# EAGLE board DarkScope (EAGLE 9.0.0)

Size 160 x 100 mm. Coordinates in mm from the lower left corner, seen from the top.
Outline: 0,0 160,0 160,100 0,100 0,0
Copper layers (1*16): Top 0.035mm / dielectric 1.5mm / Bottom 0.035mm
Design rules "default": minimum track width 6mil, minimum drill 0.35mm, track to track 6mil, track to pad 6mil, pad to pad 6mil, via to via 6mil, smd to smd 6mil, copper to edge 40mil, drill to drill 6mil, minimum pad ring 10mil, minimum via ring 8mil, stop-mask expansion 4mil, vias tented up to drill 0mil, thermal gap 10mil

## Footprints (pad centres in the part's own frame; a part is rotated, then mirrored left to right if it is on the bottom)
C0603 = smd 1.1 x 1: 1 -0.85,0; 2 0.85,0
CTRIM3018_11 = smd 2.3 x 1.6: + -2.35,0; - 2.35,0
C0603K = smd 1.05 x 1.08: 1 -0.875,0; 2 0.875,0
C1206 = smd 1.6 x 1.8: 1 -1.4,0; 2 1.4,0
SOD80C = smd 1.4 x 1.8: A 1.7,0; C -1.7,0
SMC = smd 2.8 x 3.8: A 3.7,0; C -3.7,0
DIODE_SMC = smd 2.8 x 3.8: A 3.7,0; C -3.7,0
QFP50P2200X2200X160-144N = smd 1.475 x 0.3: 1 -10.738,8.75; 2 -10.738,8.25; 3 -10.738,7.75; 4 -10.738,7.25; 5 -10.738,6.75; 6 -10.738,6.25; 7 -10.738,5.75; 8 -10.738,5.25; 9 -10.738,4.75; 10 -10.738,4.25; 11 -10.738,3.75; 12 -10.738,3.25; 13 -10.738,2.75; 14 -10.738,2.25; 15 -10.738,1.75; 16 -10.738,1.25; 17 -10.738,0.75; 18 -10.738,0.25; 19 -10.738,-0.25; 20 -10.738,-0.75; 21 -10.738,-1.25; 22 -10.738,-1.75; 23 -10.738,-2.25; 24 -10.738,-2.75; 25 -10.738,-3.25; 26 -10.738,-3.75; 27 -10.738,-4.25; 28 -10.738,-4.75; 29 -10.738,-5.25; 30 -10.738,-5.75; 31 -10.738,-6.25; 32 -10.738,-6.75; 33 -10.738,-7.25; 34 -10.738,-7.75; 35 -10.738,-8.25; 36 -10.738,-8.75; 73 10.738,-8.75; 74 10.738,-8.25; 75 10.738,-7.75; 76 10.738,-7.25; 77 10.738,-6.75; 78 10.738,-6.25; 79 10.738,-5.75; 80 10.738,-5.25; 81 10.738,-4.75; 82 10.738,-4.25; 83 10.738,-3.75; 84 10.738,-3.25; 85 10.738,-2.75; 86 10.738,-2.25; 87 10.738,-1.75; 88 10.738,-1.25; 89 10.738,-0.75; 90 10.738,-0.25; 91 10.738,0.25; 92 10.738,0.75; 93 10.738,1.25; 94 10.738,1.75; 95 10.738,2.25; 96 10.738,2.75; 97 10.738,3.25; 98 10.738,3.75; 99 10.738,4.25; 100 10.738,4.75; 101 10.738,5.25; 102 10.738,5.75; 103 10.738,6.25; 104 10.738,6.75; 105 10.738,7.25; 106 10.738,7.75; 107 10.738,8.25; 108 10.738,8.75 | smd 0.3 x 1.475: 37 -8.75,-10.738; 38 -8.25,-10.738; 39 -7.75,-10.738; 40 -7.25,-10.738; 41 -6.75,-10.738; 42 -6.25,-10.738; 43 -5.75,-10.738; 44 -5.25,-10.738; 45 -4.75,-10.738; 46 -4.25,-10.738; 47 -3.75,-10.738; 48 -3.25,-10.738; 49 -2.75,-10.738; 50 -2.25,-10.738; 51 -1.75,-10.738; 52 -1.25,-10.738; 53 -0.75,-10.738; 54 -0.25,-10.738; 55 0.25,-10.738; 56 0.75,-10.738; 57 1.25,-10.738; 58 1.75,-10.738; 59 2.25,-10.738; 60 2.75,-10.738; 61 3.25,-10.738; 62 3.75,-10.738; 63 4.25,-10.738; 64 4.75,-10.738; 65 5.25,-10.738; 66 5.75,-10.738; 67 6.25,-10.738; 68 6.75,-10.738; 69 7.25,-10.738; 70 7.75,-10.738; 71 8.25,-10.738; 72 8.75,-10.738; 109 8.75,10.738; 110 8.25,10.738; 111 7.75,10.738; 112 7.25,10.738; 113 6.75,10.738; 114 6.25,10.738; 115 5.75,10.738; 116 5.25,10.738; 117 4.75,10.738; 118 4.25,10.738; 119 3.75,10.738; 120 3.25,10.738; 121 2.75,10.738; 122 2.25,10.738; 123 1.75,10.738; 124 1.25,10.738; 125 0.75,10.738; 126 0.25,10.738; 127 -0.25,10.738; 128 -0.75,10.738; 129 -1.25,10.738; 130 -1.75,10.738; 131 -2.25,10.738; 132 -2.75,10.738; 133 -3.25,10.738; 134 -3.75,10.738; 135 -4.25,10.738; 136 -4.75,10.738; 137 -5.25,10.738; 138 -5.75,10.738; 139 -6.25,10.738; 140 -6.75,10.738; 141 -7.25,10.738; 142 -7.75,10.738; 143 -8.25,10.738; 144 -8.75,10.738
SOIC127P600X175-8N = smd 1.525 x 0.65: 1 -2.712,1.905; 2 -2.712,0.635; 3 -2.712,-0.635; 4 -2.712,-1.905; 5 2.712,-1.905; 6 2.712,-0.635; 7 2.712,0.635; 8 2.712,1.905
SOT95P280X145-5N = smd 1.2 x 0.6: 1 -1.25,0.95; 2 -1.25,0; 3 -1.25,-0.95; 4 1.25,-0.95; 5 1.25,0.95
QFN50P400X400X100-21N = smd 0.8 x 0.3: 1 -2,1; 2 -2,0.5; 3 -2,0; 4 -2,-0.5; 5 -2,-1; 11 2,-1; 12 2,-0.5; 13 2,0; 14 2,0.5; 15 2,1 | smd 0.3 x 0.8: 6 -1,-2; 7 -0.5,-2; 8 0,-2; 9 0.5,-2; 10 1,-2; 16 1,2; 17 0.5,2; 18 0,2; 19 -0.5,2; 20 -1,2 | smd 2.8 x 2.8: 21 0,0
SOT223 = smd 1.499 x 2.007: 1 -2.261,-3.15; 2 0.025,-3.15; 3 2.311,-3.15 | smd 3.81 x 2.007: 4 0,3.15
C0R-JMP = smd 0.8 x 1: 1 0,0.938; 3 0,-0.938 | smd 1 x 0.8: 2 0,0
0204/7 = drill 0.813 octagon: 1 -3.81,0; 2 3.81,0
R0603 = smd 1 x 1.1: 1 -0.85,0; 2 0.85,0
MICRO-SD9+4P-SMD-16.1X14.5X1.85MM = smd 1.6 x 0.7: 1 0,2.25; 2 0,1.15; 3 0,0.05; 4 0,-1.05; 5 0,-2.15; 6 0,-3.25; 7 0,-4.35; 8 0,-5.45; 9 0,-6.55 | smd 1.6 x 1.4: G1 0.6,-7.85 | smd 2.2 x 1.4: G2 10.1,-7.85; G3 10.1,7.85 | smd 1.4 x 1.8: G4 0.5,6.95 | hole 0.9: 10.5,-4.95; 10.5,3.05
SJ = smd 1.168 x 1.6: 1 -0.762,0; 2 0.762,0
SOT23-BEC = smd 1 x 1.4: B -0.95,-1.1; C 0,1.1; E 0.95,-1.1
TP07R = smd 0.7 x 0.7: TP 0,0
QFN50P700X700X80-48 = smd 0.55 x 0.25: 1 -3.378,2.75; 2 -3.378,2.25; 3 -3.378,1.75; 4 -3.378,1.25; 5 -3.378,0.75; 6 -3.378,0.25; 7 -3.378,-0.25; 8 -3.378,-0.75; 9 -3.378,-1.25; 10 -3.378,-1.75; 11 -3.378,-2.25; 12 -3.378,-2.75; 25 3.378,-2.75; 26 3.378,-2.25; 27 3.378,-1.75; 28 3.378,-1.25; 29 3.378,-0.75; 30 3.378,-0.25; 31 3.378,0.25; 32 3.378,0.75; 33 3.378,1.25; 34 3.378,1.75; 35 3.378,2.25; 36 3.378,2.75 | smd 0.25 x 0.55: 13 -2.75,-3.378; 14 -2.25,-3.378; 15 -1.75,-3.378; 16 -1.25,-3.378; 17 -0.75,-3.378; 18 -0.25,-3.378; 19 0.25,-3.378; 20 0.75,-3.378; 21 1.25,-3.378; 22 1.75,-3.378; 23 2.25,-3.378; 24 2.75,-3.378; 37 2.75,3.378; 38 2.25,3.378; 39 1.75,3.378; 40 1.25,3.378; 41 0.75,3.378; 42 0.25,3.378; 43 -0.25,3.378; 44 -0.75,3.378; 45 -1.25,3.378; 46 -1.75,3.378; 47 -2.25,3.378; 48 -2.75,3.378
BGA48C75P6X8_950X800X100 = smd 0.25 x 0.25: A1 -1.875,2.625; A2 -1.125,2.625; A3 -0.375,2.625; A4 0.375,2.625; A5 1.125,2.625; A6 1.875,2.625; B1 -1.875,1.875; B2 -1.125,1.875; B3 -0.375,1.875; B4 0.375,1.875; B5 1.125,1.875; B6 1.875,1.875; C1 -1.875,1.125; C2 -1.125,1.125; C3 -0.375,1.125; C4 0.375,1.125; C5 1.125,1.125; C6 1.875,1.125; D1 -1.875,0.375; D2 -1.125,0.375; D3 -0.375,0.375; D4 0.375,0.375; D5 1.125,0.375; D6 1.875,0.375; E1 -1.875,-0.375; E2 -1.125,-0.375; E3 -0.375,-0.375; E4 0.375,-0.375; E5 1.125,-0.375; E6 1.875,-0.375; F1 -1.875,-1.125; F2 -1.125,-1.125; F3 -0.375,-1.125; F4 0.375,-1.125; F5 1.125,-1.125; F6 1.875,-1.125; G1 -1.875,-1.875; G2 -1.125,-1.875; G3 -0.375,-1.875; G4 0.375,-1.875; G5 1.125,-1.875; G6 1.875,-1.875; H1 -1.875,-2.625; H2 -1.125,-2.625; H3 -0.375,-2.625; H4 0.375,-2.625; H5 1.125,-2.625; H6 1.875,-2.625
MICRO-USB5+6P-SMD-0.65-AB = smd 0.4 x 1.35: 1 -1.3,2.875; 2 -0.65,2.875; 3 0,2.875; 4 0.65,2.875; 5 1.3,2.875 | smd 1.9 x 1.9: P1 -1.2,0; P2 1.2,0 | drill 0.508 pad 1.016 long: P3 -3.625,0; P4 3.625,0 | drill 0.8: P5 -2.425,2.73; P6 2.425,2.73
SMD2,54-5,08 = smd 2.54 x 5.08: 1 0,0
AMP_227161 = drill 0.9 pad 1.27: 1 0,-5.08; 2 -2.54,-5.08 | hole 2: -5.08,0; 5.08,0

## Placement (x,y rotation side)
C1  0.1uf  [C0603]  -105.41,104.14 0 top  (outside the outline)
C2  220pf  [C0603]  -73.66,104.14 0 top  (outside the outline)
C3  3pf  [C0603]  -87.63,116.84 0 top  (outside the outline)
C4  1PF  [C0603]  -64.77,111.76 0 top  (outside the outline)
C5  30pf  [CTRIM3018_11]  -64.77,72.39 0 top  (outside the outline)
C6  30pf  [CTRIM3018_11]  -72.39,72.39 0 top  (outside the outline)
C7  120pf  [C0603]  -80.01,104.14 0 top  (outside the outline)
C8  120pf  [C0603]  -86.36,104.14 0 top  (outside the outline)
C9  0.1uf  [C0603]  -17.78,111.76 0 top  (outside the outline)
C10  100uf  [C0603K]  -97.79,116.84 0 top  (outside the outline)
C11  1uf  [C0603K]  -19.05,121.92 0 top  (outside the outline)
C12  100uf  [C0603K]  -102.87,116.84 0 top  (outside the outline)
C13  1uf  [C0603K]  -15.24,121.92 0 top  (outside the outline)
C14  [C0603K]  -105.41,129.54 0 top  (outside the outline)
C15  [C0603K]  -15.24,133.35 0 top  (outside the outline)
C37  100uF Tantalum  [C1206]  -44.45,97.79 0 top  (outside the outline)
D1  [SOD80C]  -27.94,120.65 0 top  (outside the outline)
D2  ss14  [SMC]  -91.44,59.69 0 top  (outside the outline)
D3  ss14  [SMC]  -19.05,73.66 0 top  (outside the outline)
D4  [SOD80C]  -33.02,120.65 0 top  (outside the outline)
D5  [DIODE_SMC]  -81.28,71.12 0 top  (outside the outline)
D6  [DIODE_SMC]  -92.71,71.12 0 top  (outside the outline)
D7  3V3_Z_D  [SOD80C]  -54.61,97.79 0 top  (outside the outline)
IC1  ATSAME70Q21A-AN  [QFP50P2200X2200X160-144N]  -43.18,12.7 0 top  (outside the outline)
IC3  TLE2082ID  [SOIC127P600X175-8N]  -17.78,105.41 0 top  (outside the outline)
IC4  SP6641BEK-L-5-0  [SOT95P280X145-5N]  -64.77,121.92 0 top  (outside the outline)
IC5  SP6641BEK-L-5-0  [SOT95P280X145-5N]  -81.28,121.92 0 top  (outside the outline)
IC6  AT45DB161E-SSHD-T  [SOIC127P600X175-8N]  -67.31,97.79 0 top  (outside the outline)
IC7  AT45DB161E-SSHD-T  [SOIC127P600X175-8N]  -87.63,97.79 0 top  (outside the outline)
IC8  MCP73871-2CAI_ML  [QFN50P400X400X100-21N]  -43.18,105.41 0 top  (outside the outline)
IC9  TLE2082ID  [SOIC127P600X175-8N]  -27.94,105.41 0 top  (outside the outline)
IC10  REG1117  [SOT223]  -77.47,60.96 0 top  (outside the outline)
IC_VDD_SELECT  0R-JUMPC  [C0R-JMP]  -49.53,72.39 0 top  (outside the outline)
JMP1  0R-JUMPC  [C0R-JMP]  -59.69,72.39 0 top  (outside the outline)
L1  10uH  [0204/7]  -40.64,120.65 0 top  (outside the outline)
L2  10uH  [0204/7]  -50.8,120.65 0 top  (outside the outline)
NTC  10K  [R0603]  -54.61,111.76 0 top  (outside the outline)
PROG1  2K2  [R0603]  -58.42,104.14 0 top  (outside the outline)
PROG2  10k  [R0603]  -67.31,104.14 0 top  (outside the outline)
R1  22K  [R0603]  -57.15,116.84 0 top  (outside the outline)
R2  10K  [R0603]  -62.23,116.84 0 top  (outside the outline)
R3  100k  [R0603]  -30.48,111.76 0 top  (outside the outline)
R4  1.8M  [R0603]  -24.13,111.76 0 top  (outside the outline)
R5  2M  [R0603]  -92.71,116.84 0 top  (outside the outline)
R6  200k  [R0603]  -36.83,111.76 0 top  (outside the outline)
R7  20k  [R0603]  -82.55,116.84 0 top  (outside the outline)
R8  300  [R0603]  -72.39,116.84 0 top  (outside the outline)
R9  180  [R0603]  -77.47,116.84 0 top  (outside the outline)
R10  120  [R0603]  -69.85,111.76 0 top  (outside the outline)
R11  1k  [R0603]  -67.31,116.84 0 top  (outside the outline)
R12  3k  [R0603]  -74.93,111.76 0 top  (outside the outline)
R13  2.2K  [R0603]  -59.69,111.76 0 top  (outside the outline)
R14  330E  [R0603]  -92.71,104.14 0 top  (outside the outline)
R15  120  [R0603]  -80.01,111.76 0 top  (outside the outline)
R16  100k  [R0603]  -43.18,111.76 0 top  (outside the outline)
R17  100k  [R0603]  -49.53,111.76 0 top  (outside the outline)
R18  1k  [R0603]  -85.09,111.76 0 top  (outside the outline)
R19  10E  [R0603]  -90.17,111.76 0 top  (outside the outline)
R20  10E  [R0603]  -95.25,111.76 0 top  (outside the outline)
R21  680E  [R0603]  -99.06,104.14 0 top  (outside the outline)
R22  10K  [R0603]  -100.33,111.76 0 top  (outside the outline)
R23  68K  [R0603]  -105.41,111.76 0 top  (outside the outline)
R24  1k  [R0603]  -16.51,116.84 0 top  (outside the outline)
R25  1k  [R0603]  -21.59,116.84 0 top  (outside the outline)
R26  1k  [R0603]  -26.67,116.84 0 top  (outside the outline)
R27  1k  [R0603]  -31.75,116.84 0 top  (outside the outline)
R74  10k  [R0603]  -36.83,116.84 0 top  (outside the outline)
R75  10k  [R0603]  -41.91,116.84 0 top  (outside the outline)
R76  10k  [R0603]  -46.99,116.84 0 top  (outside the outline)
R77  10k  [R0603]  -52.07,116.84 0 top  (outside the outline)
SD1  ST-TF-003A  [MICRO-SD9+4P-SMD-16.1X14.5X1.85MM]  -71.12,8.89 0 top  (outside the outline)
SJ1  [SJ]  -22.86,120.65 0 top  (outside the outline)
T1  BC807-40SMD  [SOT23-BEC]  -24.13,82.55 0 top  (outside the outline)
T2  BC807-40SMD  [SOT23-BEC]  -38.1,82.55 0 top  (outside the outline)
T3  BC807-40SMD  [SOT23-BEC]  -52.07,82.55 0 top  (outside the outline)
T4  BC807-40SMD  [SOT23-BEC]  -66.04,82.55 0 top  (outside the outline)
T5  BC807-40SMD  [SOT23-BEC]  -80.01,82.55 0 top  (outside the outline)
T6  BC807-40SMD  [SOT23-BEC]  -93.98,82.55 0 top  (outside the outline)
T7  BC807-40SMD  [SOT23-BEC]  -24.13,90.17 0 top  (outside the outline)
T8  BC807-40SMD  [SOT23-BEC]  -38.1,90.17 0 top  (outside the outline)
T9  BC807-40SMD  [SOT23-BEC]  -52.07,90.17 0 top  (outside the outline)
T10  BC807-40SMD  [SOT23-BEC]  -66.04,90.17 0 top  (outside the outline)
T11  BC807-40SMD  [SOT23-BEC]  -80.01,90.17 0 top  (outside the outline)
T12  BC807-40SMD  [SOT23-BEC]  -93.98,90.17 0 top  (outside the outline)
T41  BC807-40SMD  [SOT23-BEC]  -24.13,97.79 0 top  (outside the outline)
TP1  TPTP07R  [TP07R]  -60.96,129.54 0 top  (outside the outline)
TP2  TPTP07R  [TP07R]  -66.04,129.54 0 top  (outside the outline)
TP3  TPTP07R  [TP07R]  -71.12,129.54 0 top  (outside the outline)
TP4  TPTP07R  [TP07R]  -76.2,129.54 0 top  (outside the outline)
TP5  TPTP07R  [TP07R]  -81.28,129.54 0 top  (outside the outline)
TP6  TPTP07R  [TP07R]  -86.36,129.54 0 top  (outside the outline)
TP7  TPTP07R  [TP07R]  -91.44,129.54 0 top  (outside the outline)
TP8  TPTP07R  [TP07R]  -96.52,129.54 0 top  (outside the outline)
TP9  TPTP07R  [TP07R]  -101.6,129.54 0 top  (outside the outline)
TP10  TPTP07R  [TP07R]  -93.98,120.65 0 top  (outside the outline)
TP11  TPTP07R  [TP07R]  -55.88,129.54 0 top  (outside the outline)
TP12  TPTP07R  [TP07R]  -100.33,120.65 0 top  (outside the outline)
TP13  TPTP07R  [TP07R]  -17.78,125.73 0 top  (outside the outline)
TP14  TPTP07R  [TP07R]  -24.13,125.73 0 top  (outside the outline)
TP15  TPTP07R  [TP07R]  -30.48,125.73 0 top  (outside the outline)
TP16  TPTP07R  [TP07R]  -36.83,125.73 0 top  (outside the outline)
TP17  TPTP07R  [TP07R]  -43.18,125.73 0 top  (outside the outline)
TP18  TPTP07R  [TP07R]  -49.53,125.73 0 top  (outside the outline)
TP19  TPTP07R  [TP07R]  -55.88,125.73 0 top  (outside the outline)
TP20  TPTP07R  [TP07R]  -62.23,125.73 0 top  (outside the outline)
TP21  TPTP07R  [TP07R]  -68.58,125.73 0 top  (outside the outline)
TP22  TPTP07R  [TP07R]  -74.93,125.73 0 top  (outside the outline)
TP23  TPTP07R  [TP07R]  -81.28,125.73 0 top  (outside the outline)
TP24  TPTP07R  [TP07R]  -87.63,125.73 0 top  (outside the outline)
TP25  TPTP07R  [TP07R]  -93.98,125.73 0 top  (outside the outline)
TP26  TPTP07R  [TP07R]  -100.33,125.73 0 top  (outside the outline)
TP27  TPTP07R  [TP07R]  -17.78,129.54 0 top  (outside the outline)
TP28  TPTP07R  [TP07R]  -24.13,129.54 0 top  (outside the outline)
TP29  TPTP07R  [TP07R]  -30.48,129.54 0 top  (outside the outline)
TP30  TPTP07R  [TP07R]  -36.83,129.54 0 top  (outside the outline)
TP31  TPTP07R  [TP07R]  -43.18,129.54 0 top  (outside the outline)
TP32  TPTP07R  [TP07R]  -49.53,129.54 0 top  (outside the outline)
U$20  MAX19516ETM+MAX19516ETM+  [QFN50P700X700X80-48]  -27.94,60.96 0 top  (outside the outline)
U$21  MAX19516ETM+MAX19516ETM+  [QFN50P700X700X80-48]  -57.15,60.96 0 top  (outside the outline)
U$22  CY62167DV30LLCY62167DV30LL-55BVI  [BGA48C75P6X8_950X800X100]  -30.48,46.99 0 top  (outside the outline)
U$23  CY62167DV30LLCY62167DV30LL-55BVI  [BGA48C75P6X8_950X800X100]  -66.04,46.99 0 top  (outside the outline)
USB1  ZX62-B-5PA  [MICRO-USB5+6P-SMD-0.65-AB]  -29.21,72.39 0 top  (outside the outline)
VBAT+  [SMD2,54-5,08]  -27.94,97.79 0 top  (outside the outline)
VBAT-/GND  [SMD2,54-5,08]  -82.55,58.42 0 top  (outside the outline)
X1  1-227161-0  [AMP_227161]  -22.86,10.16 0 top  (outside the outline)

## Library data of the parts
C1-C9 C14 C15 C37 = rcl; SPICEPREFIX: C
C10-C13 = resistor
D1-D4 D7 = diode
D5 D6 = eagle-ltspice; SPICEMODEL: NONE; SPICEPREFIX: D; SPICETYPE: diode
IC1 = SamacSys_Parts; ARROW_PART_NUMBER: ATSAME70Q21A-AN; ARROW_PRICE/STOCK: https://www.arrow.com/en/products/atsame70q21a-an/microchip-technology; DESCRIPTION: ATMEL - ATSAME70Q21A-AN - MCU, 32BIT, CORTEX-M7, 300MHZ, LQFP-144; HEIGHT: 1.6mm; MANUFACTURER_NAME: Microchip; MANUFACTURER_PART_NUMBER: ATSAME70Q21A-AN; RS_PART_NUMBER: 1463226; RS_PRICE/STOCK: http://uk.rs-online.com/web/p/products/1463226
IC3 IC9 = SamacSys_Parts; ARROW_PART_NUMBER: TLE2082ID; ARROW_PRICE/STOCK: https://www.arrow.com/en/products/tle2082id/texas-instruments; DESCRIPTION: TLE2082ID, Dual Operational Amplifier 9.4MHz, 8-Pin SOIC; HEIGHT: 1.75mm; MANUFACTURER_NAME: Texas Instruments; MANUFACTURER_PART_NUMBER: TLE2082ID; RS_PART_NUMBER: 3570120P; RS_PRICE/STOCK: http://uk.rs-online.com/web/p/products/3570120P
IC4 IC5 = SamacSys_Parts; ARROW_PART_NUMBER: SP6641BEK-L-3-3/TR; ARROW_PRICE/STOCK: https://www.arrow.com/en/products/sp6641bek-l-3-3tr/exar; DESCRIPTION: Voltage Regulators - Switching Regulators 100mA Alkaline DC/DC; HEIGHT: 1.45mm; MANUFACTURER_NAME: EXAR; MANUFACTURER_PART_NUMBER: SP6641BEK-L-3-3/TR
IC6 IC7 = SamacSys_Parts; ARROW_PART_NUMBER: AT45DB161E-SSHD-T; ARROW_PRICE/STOCK: https://www.arrow.com/en/products/at45db161e-sshd-t/adesto-technologies-corporation-inc; DESCRIPTION: Flash Memory 16M 2.5-3.6V 85Mhz Data Flash; HEIGHT: 1.75mm; MANUFACTURER_NAME: Adesto Technologies; MANUFACTURER_PART_NUMBER: AT45DB161E-SSHD-T
IC8 = SamacSys_Parts; ALLIED_NUMBER: 70046852; ALLIED_PRICE/STOCK: http://www.alliedelec.com/microchip-technology-inc-mcp73871-2cai-ml/70046852/; ARROW_PART_NUMBER: MCP73871-2CAI/ML; ARROW_PRICE/STOCK: https://www.arrow.com/en/products/mcp73871-2caiml/microchip-technology; DESCRIPTION: Li-Ion Charger USB/DC 4.2V 1A TE QFN20; HEIGHT: 1mm; MANUFACTURER_NAME: Microchip; MANUFACTURER_PART_NUMBER: MCP73871-2CAI/ML; RS_PART_NUMBER: 1460132; RS_PRICE/STOCK: http://uk.rs-online.com/web/p/products/1460132
IC10 = burr-brown; MPN: REG1117; OC_FARNELL: 1097566; OC_NEWARK: 14P6981
IC_VDD_SELECT JMP1 = jump-0r-smd
L1 L2 = eagle-ltspice; SPICEMODEL: NONE; SPICEPREFIX: L
NTC PROG1 PROG2 R1-R27 R74-R77 = rcl; SPICEPREFIX: R
SD1 = Seeed-Connector; MPN: ST-TF-003A
SJ1 = jumper
T1-T12 T41 = transistor-pnp
TP1-TP32 = testpad
U$20-U$23 = Boltz_RnD
USB1 = Seeed-Connector; MPN: ZX62-B-5PA
VBAT+ VBAT-/GND = wirepad
X1 = con-coax; MF: TYCO ELECTRONICS; MPN: 1-227161; OC_FARNELL: unknown; OC_NEWARK: 33B3200

## Nets
3V3: T41.E TP31.TP
3V3D: C15.1 IC10.2 T41.C TP29.TP TP32.TP
+3V3: C10.1 IC4.5 IC_VDD_SELECT.1 L1.2
+5V: C37.1 D5.C D6.C IC8.2 IC8.18 IC8.19 PROG2.2 R77.2 TP17.TP TP25.TP
+5V/1: C11.1 D2.C IC3.8 IC9.8 IC_VDD_SELECT.3 R12.2 R20.1 TP7.TP TP11.TP TP28.TP
+5V/2: C13.1 D3.C R19.1 TP27.TP
BMC_PG: R76.1 TP19.TP
BMC_STAT1: R74.1 TP21.TP
BMC_STAT2: R75.1 TP20.TP
CNTRL_3_3V: T41.B
GND: C5.- C6.- C7.2 C8.2 C9.2 C10.2 C11.2 C12.2 C13.2 C14.2 C15.2 C37.2 D7.A IC3.4 IC4.2 IC5.2 IC8.10 IC8.11 IC9.4 IC10.1 PROG1.1 R6.2 R7.2 R10.2 R21.1 SJ1.1 T4.C TP15.TP TP26.TP USB1.5 USB1.P1 USB1.P2 USB1.P3 USB1.P4 USB1.P5 USB1.P6 VBAT-/GND.1
GND1: IC1.44
GND2: IC1.61
GND3: IC1.95
GND4: IC1.115
GND5: IC1.135
GND6: IC1.138
N$1: R2.1 X1.2
N$2: JMP1.1 R1.1 R2.2 TP12.TP
N$3: C1.2 T3.C
N$4: T1.B
N$5: R8.2 R9.1 T8.C
N$6: D4.C R22.1 R23.2 T12.C TP1.TP TP13.TP X1.1
N$7: T10.B
N$8: C2.1 C3.1 C4.1 R3.2 R4.2 R5.2 T2.E T3.E T4.E TP2.TP
N$9: C4.2 C6.+ C7.1 R5.1 R7.1 T7.C
N$10: C2.2 R3.1 T5.C
N$11: C3.2 C5.+ R4.1 R6.1 T6.C
N$12: R9.2 R10.1 T9.C
N$13: IC3.3 T5.E T6.E T7.E TP3.TP
N$14: D2.A IC4.1 L1.1
N$15: T5.B
N$16: T6.B
N$17: T7.B
N$18: T4.B
N$19: T3.B
N$20: T2.B
N$21: IC3.5 T8.E T9.E T10.E TP4.TP
N$22: IC3.6 R11.1 R12.1 R13.2
N$23: IC3.7 R11.2 R14.1 R15.2
N$24: C8.1 R14.2 TP8.TP
N$25: IC9.3 R15.1 R16.2
N$26: IC9.1 R16.1 R18.2 TP6.TP
N$27: C9.1 IC9.2 R17.2
N$28: R17.1 TP10.TP
N$29: R18.1 TP9.TP
N$30: D7.C IC3.1 IC3.2 R8.1 T10.C TP5.TP
N$31: IC4.3 R20.2
N$32: IC5.3 R19.2
N$33: D3.A IC5.1 L2.1
N$34: R13.1 R21.2 SJ1.2
N$35: T8.B
N$36: R22.2 T1.E
N$37: R1.2 R23.1
N$38: JMP1.2 T1.C
N$39: T9.B
N$40: D1.A R24.2 R25.2
N$41: R25.1 T11.B
N$42: D1.C T11.C
N$43: D4.A R26.2 R27.2
N$44: R27.1 T12.B
N$46: C1.1 T2.C T12.E
N$117: IC8.8 R74.2
N$118: IC8.5 NTC.2 TP18.TP
N$119: IC8.6 R76.2
N$120: IC8.7 R75.2
N$121: IC8.13 PROG1.2 TP16.TP
N$122: IC8.14 IC8.15 IC8.16 TP14.TP VBAT+.1
N$123: IC8.4 PROG2.1
N$124: IC8.17 R77.1
USBD+: TP23.TP USB1.3
USBD-: TP24.TP USB1.2
USBID: TP22.TP USB1.4
VBUS: D5.A D6.A USB1.1
VCC: C12.1 C14.1 IC5.5 IC8.1 IC8.20 IC10.3 L2.2 TP30.TP
VCCINT: IC_VDD_SELECT.2
VDDCORE1: IC1.29
VDDCORE2: IC1.33
VDDCORE3: IC1.50
VDDCORE4: IC1.81
VDDCORE5: IC1.107
VDDIN: IC1.5
VDDIO1: IC1.30
VDDIO2: IC1.43
VDDIO3: IC1.72
VDDIO4: IC1.80
VDDIO5: IC1.96
VDDOUT: IC1.3
VDDPLL: IC1.123
VDDPLLUSB: IC1.143
VDDUTMIC: IC1.139
VDDUTMII: IC1.134

## Tracks (layer width: path | path; a pad name or v marks a point on that pad's centre or on a via)
3V3  (1 unrouted)
3V3D  (4 unrouted)
+3V3  (3 unrouted)
+5V  (9 unrouted)
+5V/1  (9 unrouted)
+5V/2  (3 unrouted)
BMC_PG  (1 unrouted)
BMC_STAT1  (1 unrouted)
BMC_STAT2  (1 unrouted)
GND  (36 unrouted)
N$1  (1 unrouted)
N$2  (3 unrouted)
N$3  (1 unrouted)
N$5  (2 unrouted)
N$6  (6 unrouted)
N$8  (9 unrouted)
N$9  (5 unrouted)
N$10  (2 unrouted)
N$11  (4 unrouted)
N$12  (2 unrouted)
N$13  (4 unrouted)
N$14  (2 unrouted)
N$21  (4 unrouted)
N$22  (3 unrouted)
N$23  (3 unrouted)
N$24  (2 unrouted)
N$25  (2 unrouted)
N$26  (3 unrouted)
N$27  (2 unrouted)
N$28  (1 unrouted)
N$29  (1 unrouted)
N$30  (5 unrouted)
N$31  (1 unrouted)
N$32  (1 unrouted)
N$33  (2 unrouted)
N$34  (2 unrouted)
N$36  (1 unrouted)
N$37  (1 unrouted)
N$38  (1 unrouted)
N$40  (2 unrouted)
N$41  (1 unrouted)
N$42  (1 unrouted)
N$43  (2 unrouted)
N$44  (1 unrouted)
N$46  (2 unrouted)
N$117  (1 unrouted)
N$118  (2 unrouted)
N$119  (1 unrouted)
N$120  (1 unrouted)
N$121  (2 unrouted)
N$122  (4 unrouted)
N$123  (1 unrouted)
N$124  (1 unrouted)
USBD+  (1 unrouted)
USBD-  (1 unrouted)
USBID  (1 unrouted)
VBUS  (2 unrouted)
VCC  (7 unrouted)